# Altium PCB soldering.PcbDoc
Units mm, origin at the board's own origin, x right, y up, seen from the top; angles counter-clockwise.
Board outline 116 x 36 mm, 2 copper layers (Top Layer, Bottom Layer), stack 1.571 mm thick; 53 components, 48 nets, 173 pads, 8 vias.
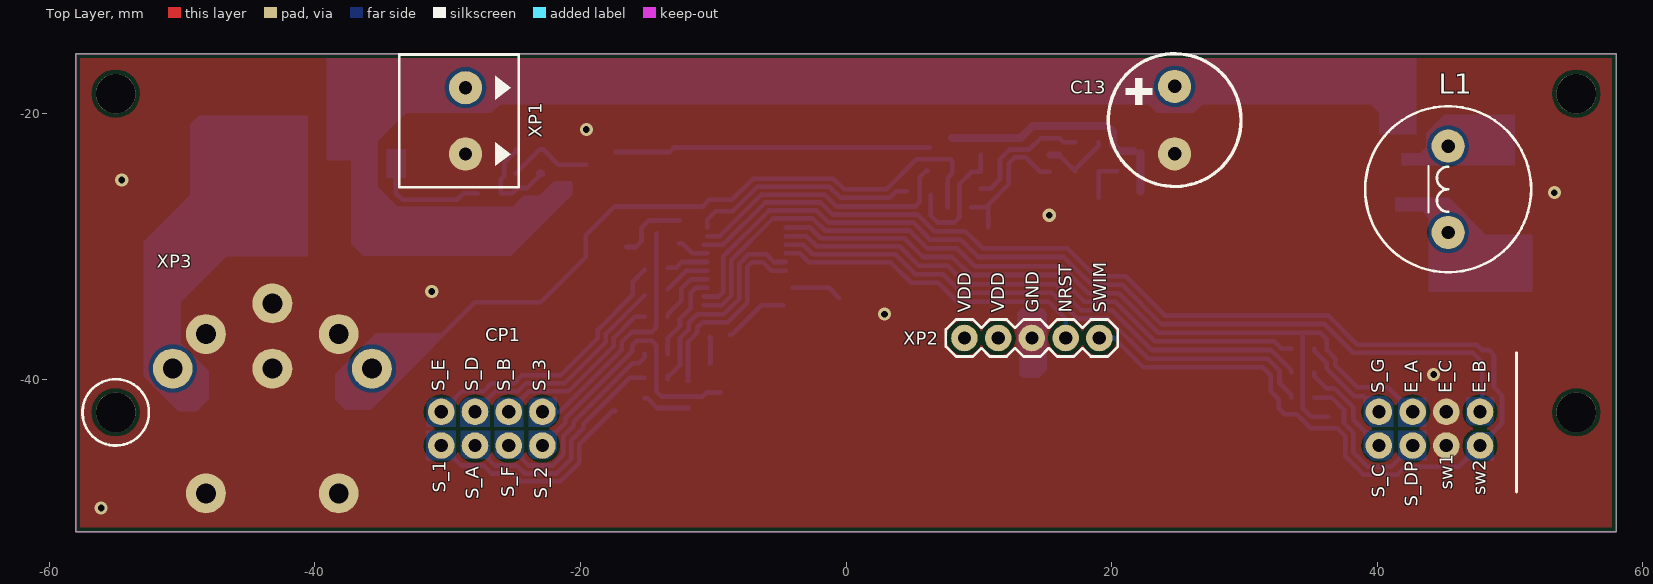
[diagram p0: Top Layer view]
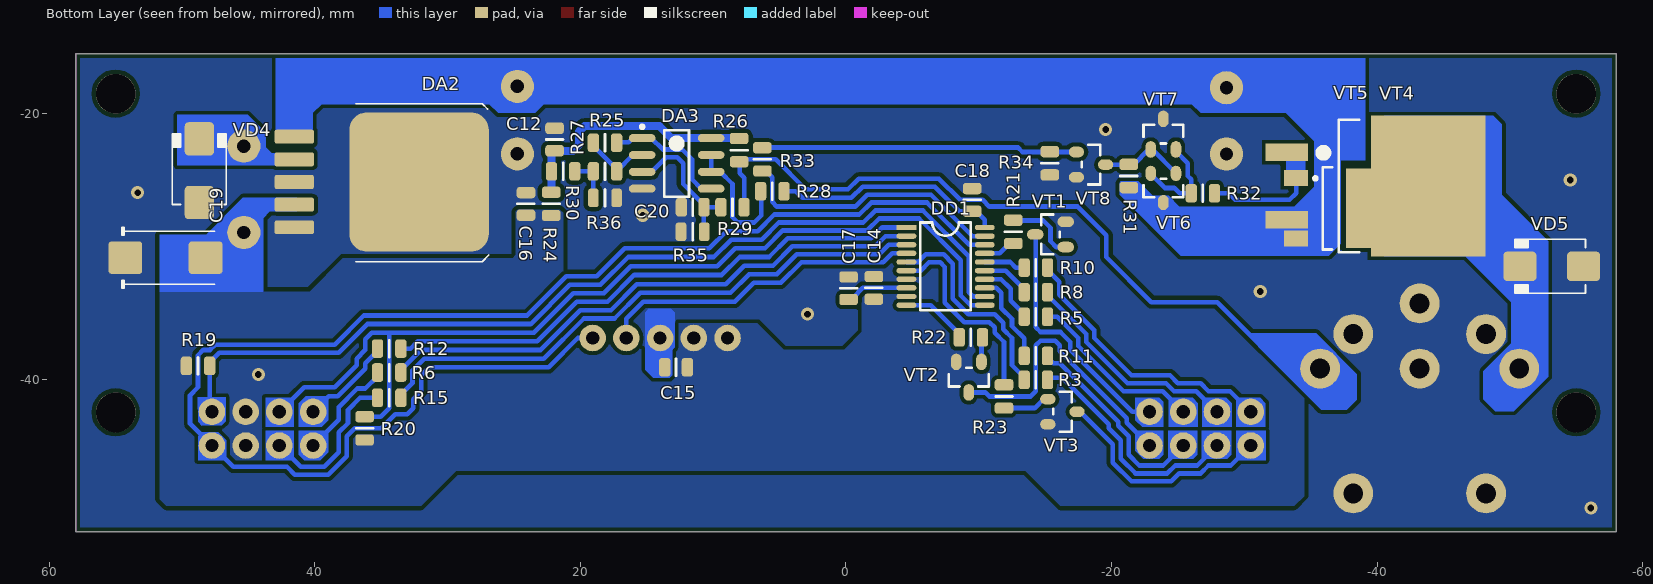
[diagram p1: Bottom Layer view, seen from below]

## Layer stack, top to bottom
Top Solder: solder mask 0.0102, Solder Resist, Dk 3.5
Top Layer: signal copper 0.0356
Dielectric1: core 1.5, FR-4, Dk 4.8
Bottom Layer: signal copper 0.0356
Bottom Solder: solder mask 0.0102, Solder Resist, Dk 3.5

## Board outline
-58,-51.5 -58,-15.5 58,-15.5 58,-51.5

## Design rules (kind name [scope] priority, off if disabled: settings)
Clearance Clearance_3 [IsRegion] p1: gap=0.3 ignorepadtopadclearanceinfootprint=FALSE except(0: Arc-Hole Track-Hole SMDPad-Hole THPad-Hole Via-Hole Fill-Hole Poly-Hole Region-Hole Text-Hole)
Clearance [All] p2: gap=0.25 ignorepadtopadclearanceinfootprint=FALSE
Clearance Clearance_2 [IsPad vs IsPad] p3: gap=0.2 ignorepadtopadclearanceinfootprint=FALSE except(0: Arc-Hole Track-Hole SMDPad-Hole THPad-Hole Via-Hole Fill-Hole Poly-Hole Region-Hole Text-Hole)
Clearance Clearance_1 [IsTrack vs IsTrack] p4: gap=0.2 ignorepadtopadclearanceinfootprint=FALSE except(0: Arc-Hole Track-Hole SMDPad-Hole THPad-Hole Via-Hole Fill-Hole Poly-Hole Region-Hole Text-Hole)
ComponentClearance [All] p1: gap=0.2 collisioncheckmode=3 verticalgap=0.2 showdistances=FALSE
HoleSize [All] p1: absolutevalues=TRUE maxlimit=40 minlimit=0.025 maxpercent=80.000 minpercent=20.000
MinimumSolderMaskSliver [All] p1: minsoldermaskwidth=0.15
PolygonConnect [All] p1: connectstyle=Direct reliefconductorwidth=0.254 reliefentries=4 polygonreliefangle="90 Angle" airgapwidth=0.254
RoutingVias [All] p1: holewidth=0.5 width=1.5 viastyle="Through Hole" minholewidth=0.2 minwidth=1 maxholewidth=2 maxwidth=3
SilkToSilkClearance [All] p1: silktosilkclearance=0.15
SilkToSolderMaskClearance SilkscreenOverComponentPads [IsPad] p1: minsilkscreentomaskgap=0.15 clearancetoexposedcopper=TRUE
SolderMaskExpansion [All] p1: expansion=0.102
Width [All] p1: maxlimit=3 minlimit=0.2 preferedwidth=1
25 further rules are at their usual default settings.

## Components (designator, comment, footprint, x,y, rotation, side; value= is the part's Value field where it differs from the comment)
C12 "10uF" CAP0805R 21.95,-21.95 r90 bottom
C13 "470uF" CAP_EL_10_19_VERT 24.75,-20.49 r90 top
C14 "10uF" CAP0805R -2.1,-33.125 r270 bottom
C15 "10uF" CAP0805R 12.8,-39.1 r180 bottom
C16 "10uF" CAP0805R 24.1,-26.8 r270 bottom
C17 "10uF" CAP0805R -0.2,-33.15 r270 bottom
C18 "100nF" CAP0805R -9.5,-26.5 r270 bottom
C19 "330uF" TAN_D 51.25,-30.85 r180 bottom
C20 "100nF" CAP0805R 11.55,-27.05 r180 bottom
CP1 "CONTROL_PANEL" CONTROL_PANEL -30.48,-45 r0 top
DA2 "LM2575S-5.0" TO-263-5 35.4,-25.15 r180 bottom
DA3 "OP Amp" SOP8 12.75,-23.75 r180 bottom
DD1 "8 Bit MCU" TSSOP20 -7.5,-31.5 r180 bottom
L1 "220 uH" SL1016 45.35,-25.7 r270 top
R3 "22" RES0805R#1 -14.3,-40.05 r180 bottom
R5 "22" RES0805R#1 -14.3,-35.3 r0 bottom
R6 "22" RES0805R#1 34.4,-39.5 r0 bottom
R8 "22" RES0805R#1 -14.3,-33.45 r0 bottom
R10 "22" RES0805R#1 -14.3,-31.6 r0 bottom
R11 "22" RES0805R#1 -14.3,-38.25 r180 bottom
R12 "22" RES0805R#1 34.4,-37.7 r180 bottom
R15 "22" RES0805R#1 34.4,-41.4 r0 bottom
R19 "10k" RES0805R#1 48.8,-39 r0 bottom
R20 "10k" RES0805R#1 36.25,-43.7 r270 bottom
R21 "22" RES0805R#1 -12.6,-28.9 r90 bottom
R22 "22" RES0805R#1 -9.4,-36.85 r180 bottom
R23 "22" RES0805R#1 -11.9,-41.3 r270 bottom
R24 "10" RES0805R#1 22.2,-26.8 r90 bottom
R25 "47k" RES0805R#1 18.15,-22.2 r180 bottom
R26 "1k" RES0805R#1 8.05,-22.75 r90 bottom
R27 "10k" RES0805R#1 18.15,-24.35 r180 bottom
R28 "6k8" RES0805R#1 5.55,-25.85 r180 bottom
R29 "10k" RES0805R#1 8.55,-27.05 r0 bottom
R30 "1k" RES0805R#1 21.3,-24.35 r180 bottom
R31 "10k" RES0805R#1 -21.3,-24.7 r270 bottom
R32 "100" RES0805R#1 -26.875,-26 r180 bottom
R33 "51" RES0805R#1 6.3,-23.45 r270 bottom
R34 "100k" RES0805R#1 -15.352,-23.741 r90 bottom
R35 "100k" RES0805R#2 11.55,-28.9 r180 bottom
R36 "51" RES0805R#2 18.15,-26.35 r0 bottom
VD4 "10BQ100" DO-214AA 48.7,-24.3 r90 bottom
VD5 "10BQ100" DO-214AA -53.15,-31.5 r0 bottom
VT1 "IRLML6402" SOT23#1 -15.4,-29.1 r90 bottom
VT2 "IRLML6402" SOT23#1 -9.25,-39.85 r0 bottom
VT3 "IRLML6402" SOT23#2 -16.3,-42.45 r180 bottom
VT4 "IRF9530NS" D2PAK -39.85,-25.45 r180 bottom
VT5 "STD10PF06T4" DPAK -38.1,-27.13 r180 bottom
VT6 "BC847C" SOT23#2 -23.9,-25.6 r270 bottom
VT7 "BC857B" SOT23#1 -23.9,-21.55 r180 bottom
VT8 "BC847C" SOT23#2 -18.452,-23.841 r180 bottom
XP1 "306-021-12" 306-021-12 -28.65,-20.55 r90 top
XP2 "PLS" PLS-05 14,-36.9 r180 top
XP3 "KDJ01-6" KDJ01-6 -43.2,-51.6 r180 top

## Footprints (in the part's own frame and the unit in brackets; to place one, negate y for a bottom-side part, rotate by r counter-clockwise, add the part's x,y. Pads: shape width x height; smd on the part's side, far side on the other; paste and mask are expansions set on the pad)
306-021-12 [mm]
  round 2.5 hole 1: 1(-2.5,0) 2(2.5,0)
  silkscreen extent -5,-4 5,5, body extent -5,-4 5,5, height 12.62
CAP0805R [mm] "capacitor 0805 reflow soldering"
  rrect50% 0.85x1.4 smd: 1(-0.85,0) 2(0.85,0)
  silkscreen extent 0,-0.64 0,0.64, body extent -1,-0.62 1,0.63, height 0.61
CAP_EL_10_19_VERT [mm]
  round 2.5 hole 1: 1(-2.54,0) 2(2.54,0)
  silkscreen extent -5,-5 5,5, body extent -5.08,-5.07 5.08,5.07, height 20.33
CONTROL_PANEL [mm]
  round 2 hole 1: 1(0,0) 2(0,2.54) 3(2.54,0) 4(2.54,2.54) 5(5.08,0) 6(5.08,2.54) 7(7.62,0) 8(7.62,2.54) 9(70.612,0) 10(70.612,2.54) 11(73.152,0) 12(73.152,2.54) 13(75.692,0) 14(75.692,2.54) 15(78.232,0) 16(78.232,2.54)
  body extent -1.4,-20.7 79.63,7.8, height 19.06
D2PAK [mm] "D2-PAK, 4-Leads, Body 8.8x10.4mm, Pitch 2.54mm, Lead Span 15.1mm, IPC High Density"
  rect 3.2x1.3 smd: 1(-6.65,2.54) 2(-6.65,-2.54)
  rect 8.6x10.6 smd: 3(4,0)
  silkscreen extent -4.2,-5 -1.2,5, body extent -7.69,-5 7.98,5, height 4.81
DO-214AA [mm] "JEDEC DO214 variation AA. SMB"
  round 0.508 on Mech15: 0(0,0)
  rrect25% 2.5x2.2 smd: A(-2.4,0) K(2.4,0)
  silkscreen extent -2.54,-2.03 2.79,2.03, body extent -2.8,-1.97 2.8,1.98, height 2.62
DPAK [mm] "D-PAK, 4-Leads, Body 6.1x6mm, Pitch 2.28mm, Lead Span 9.7mm, IPC High Density"
  rect 1.8x1.2 smd: 1(-4.2,2.28) 2(-4.2,-2.28)
  rect 6x6 smd: 3(2.54,0)
  silkscreen extent -2.88,-3.1 -1.5,3.1, body extent -4.55,-3.28 5.15,3.3, height 2.32
KDJ01-6 [mm]
  round 3 hole 1.5: 1(-7.5,-12.4) 2(-5,-15) 3(0,-17.3) 4(5,-15) 5(7.5,-12.4) 6(0,-12.4) 7(-5,-3) 8(5,-3)
  body extent -10.5,-19.5 10.5,0, height 19.51
PLS-05 [mm]
  round 2 hole 1: 1(-5.08,0) 2(-2.54,0) 3(0,0) 4(2.54,0) 5(5.08,0)
  silkscreen extent -6.48,-1.4 6.48,1.4, body extent -6.35,-1.27 6.35,1.27, height 8.45
RES0805R#1 [mm] "resistor 0805 reflow soldering"
  rrect50% 0.85x1.4 smd: 1(-0.875,0) 2(0.875,0)
  silkscreen extent 0,-0.64 0,0.64, body extent -1,-0.62 1,0.63, height 0.61
RES0805R#2 [mm] "resistor 0805 reflow soldering"
  rrect50% 0.8x1.4 smd: 1(-0.875,0) 2(0.875,0)
  silkscreen extent 0,-0.64 0,0.64, body extent -1,-0.62 1,0.63, height 0.61
SL1016 [mm]
  round 2.5 hole 1: 1(-3.25,0) 2(3.25,0)
  silkscreen extent -6.25,-6.25 6.25,6.25, body extent -6.5,-6.5 6.5,6.5, height 20
SOP8 [mm] "SOP, 8-Leads"
  oval 2x0.6 smd mask+0.1: 1(-2.6,1.905) 2(-2.6,0.635) 3(-2.6,-0.635) 4(-2.6,-1.905) 5(2.6,-1.905) 6(2.6,-0.635) 7(2.6,0.635) 8(2.6,1.905)
  silkscreen extent -2.73,-2.5 0.92,2.88, body extent -2.9,-2.4 2.9,2.4, height 1.77
SOT23#1 [mm]
  oval 0.8x1.25 smd mask+0.1: 1(-0.95,-1.15) 2(0.95,-1.15) 3(0,1.15)
  silkscreen extent -1.5,-0.7 1.5,0.7, body extent -1.46,-1.16 1.46,1.18, height 1
SOT23#2 [mm]
  oval 1.15x0.8 smd mask+0.1: 1(-1.1,0.95) 2(-1.1,-0.95) 3(1.1,0)
  silkscreen extent -0.7,-1.5 0.7,1.5, body extent -1.16,-1.46 1.18,1.46, height 1
TAN_D [mm] "Molded body capacitor, Body 7.3x4.3mm, 2917, IPC Nominal settings"
  round 1 on Mech15: 0(0,0)
  rrect20% 2.55x2.45 smd: 1(-3.025,0) 2(3.025,0)
  silkscreen extent -3.3,-2.3 3.7,2.3, body extent -3.8,-1.97 3.8,1.98, height 3.1
TO-263-5 [mm] "D-PAK/TO-263-5; 5 Leads; Body 14.4 (inc. leads) x 10.4 mm (LxW max)"
  round 0.5 on Mech15: 0(0,0)
  rrect25% 2.95x1.05 smd: 1(-6.15,3.41) 2(-6.15,1.705) 3(-6.15,0) 4(-6.15,-1.705) 5(-6.15,-3.41)
  rrect25% 10.5x10.5 smd: 6(3.25,0)
  silkscreen extent -1.5,-6 8.5,5.9, body extent -6.73,-5.08 7.29,5.08, height 4.56
TSSOP20 [mm] "TSOP, 20-Leads, Body 6,6x4,5mm (max), Pitch 0,65mm, IPC Medium Density"
  rect 1.5x0.4 smd mask+0.05: 1(-2.95,2.925)
  oval 1.5x0.4 smd mask+0.05: 2(-2.95,2.275) 3(-2.95,1.625) 4(-2.95,0.975) 5(-2.95,0.325) 6(-2.95,-0.325) 7(-2.95,-0.975) 8(-2.95,-1.625) 9(-2.95,-2.275) 10(-2.95,-2.925) 11(2.95,-2.925) 12(2.95,-2.275) 13(2.95,-1.625) 14(2.95,-0.975) 15(2.95,-0.325) 16(2.95,0.325) 17(2.95,0.975) 18(2.95,1.625) 19(2.95,2.275) 20(2.95,2.925)
  silkscreen extent -1.9,-3.3 1.9,3.3, body extent -3.27,-3.3 3.28,3.3, height 1.11

## Part data
C12 C14 C15 C16 C17: library part CC0805_10UF_10V_10%_X7R, "SMD 0805 Capacitor", Case=0805, Manufacturer=GENERIC, Manufacturer1 ComponentHeight=1.35mm, Manufacturer1 Example=MURATA, Manufacturer1 Part Number=GRM21BR71A106KE51L, Tolerance=±10%, Voltage=10V, Author="I. Kuznetsov", Component Type=Standard, CreateDate=30.04.2012, HelpURL=\\cern.ch\dfs\Applications\Altium\Datasheets\CC0805_X7R_MURATA.pdf, LatestRevisionDate=30.04.2012, Manufacturer Part Number=CC0805_10UF_10V_10%_X7R, Mounted=Yes, Part Description="SMD Multilayer Chip Ceramic Capacitor", Part Number=CC0805_10UF_10V_10%_X7R, Pin Count=2, SMD=Yes, Socket=No, Status=Preferred, Table="Capacitors SMD", TC=X7R
C13: library part "SH050M0470B5S-1019 (VERT MOUNTED)", Voltage=50V, Part Number="SH050M0470B5S-1019 (VERT MOUNTED)", Table="Electrolytic THD"
C18 C20: library part CC0805_100NF_50V_10%_X7R, "SMD 0805 Capacitor", Case=0805, Manufacturer=GENERIC, Manufacturer1 ComponentHeight=1.35mm, Manufacturer1 Example=EPCOS, Manufacturer1 Part Number=B37941K5104K62, Tolerance=±10%, Voltage=50V, Author="I. Kuznetsov", Component Type=Standard, CreateDate=03.12.2007, HelpURL=\\cern.ch\dfs\Applications\Altium\Datasheets\CC0805_X7R_EPCOS.pdf, LatestRevisionDate=03.12.2007, Manufacturer Part Number=CC0805_100NF_50V_10%_X7R, Mounted=Yes, Part Description="SMD Multilayer Chip Ceramic Capacitor", Part Number=CC0805_100NF_50V_10%_X7R, Pin Count=2, SMD=Yes, Socket=No, Status=Preferred, Table="Capacitors SMD", TC=X7R
C19: library part T495D337M010AHE100, Voltage=10V, Part Number=T495D337M010AHE100, Table=Tantalum
DA2: Case=TO-263-5, Manufacturer=TI, Author="I. Kuznetsov", Component Type=Standard, Device=LM2575S-5.0, Manufacturer Part Number=LM2575S-5.0, Mounted=Yes, Part Number=LM2575S-5.0, Pin Count=6, SMD=Yes, Socket=No, Status=Active, Table=Regulators
DA3: library part LM358AM, PartNumber=LM358AM
DD1: library part STM8S003F3P6, "8 Bit MCU (STmicroelectronics)", PartNumber=STM8S003F3P6
L1: library part SL1016T-4R7K-B-N, Tolerance="± 10%", Part Number=SL1016T-4R7K-B-N, Table="Inductors THD"
R3 R5 R6 R8 R10 R11 R12 R15 R21 R22 R23: library part R0805_22R_1%_0.125W_100PPM, Case=0805, Manufacturer=GENERIC, Manufacturer1 ComponentHeight=0.6mm, Manufacturer1 Example="NIC COMPONENT", Manufacturer1 Part Number=NRC10F22R0TRF, Power=0.125W, Tolerance=±1%, Author="CERN DEM JLC", Component Type=Standard, CreateDate=03.12.2007, HelpURL=\\cern.ch\dfs\Applications\Altium\Datasheets\R0805_NIC_NRC.pdf, LatestRevisionDate=13.03.2008, Manufacturer Part Number=R0805_22R_1%_0.125W_100PPM, Mounted=Yes, Part Description="General Purpose Thick Film Chip Resistor", Part Number=R0805_22R_1%_0.125W_100PPM, Pin Count=2, SMD=Yes, Socket=No, Status=Preferred, Table="Resistors SMD", TC=±100ppm/°C
R19 R20 R27 R29 R31: library part R0805_10K_1%_0.125W_100PPM, Case=0805, Manufacturer=GENERIC, Manufacturer1 ComponentHeight=0.6mm, Manufacturer1 Example="NIC COMPONENT", Manufacturer1 Part Number=NRC10F1002TRF, Power=0.125W, Tolerance=±1%, Author="CERN DEM JLC", Component Type=Standard, HelpURL=\\cern.ch\dfs\Applications\Altium\Datasheets\R0805_NIC_NRC.pdf, Manufacturer Part Number=R0805_10K_1%_0.125W_100PPM, Mounted=Yes, Part Description="General Purpose Thick Film Chip Resistor", Part Number=R0805_10K_1%_0.125W_100PPM, Pin Count=2, SMD=Yes, Socket=No, Status=Preferred, Table="Resistors SMD", TC=±100ppm/°C
  R19 R20 R31: CreateDate=03.12.2007, LatestRevisionDate=13.03.2008
  R27 R29: CreateDate=12/3/2007, LatestRevisionDate=3/13/2008, PackageDescription=Standard
R24: library part R0805_10R_1%_0.125W_200PPM, Case=0805, Manufacturer=GENERIC, Manufacturer1 ComponentHeight=0.6mm, Manufacturer1 Example="NIC COMPONENT", Manufacturer1 Part Number=NRC10F10R0TRF, Power=0.125W, Tolerance=±1%, Author="CERN DEM JLC", Component Type=Standard, CreateDate=03.12.2007, HelpURL=\\cern.ch\dfs\Applications\Altium\Datasheets\R0805_NIC_NRC.pdf, LatestRevisionDate=24.06.2009, Manufacturer Part Number=R0805_10R_1%_0.125W_200PPM, Mounted=Yes, Part Description="General Purpose Thick Film Chip Resistor", Part Number=R0805_10R_1%_0.125W_200PPM, Pin Count=2, SMD=Yes, Socket=No, Status=Preferred, Table="Resistors SMD", TC=±200ppm/°C
R25: library part R0805_47K_1%_0.125W_100PPM, Case=0805, Manufacturer=GENERIC, Manufacturer1 ComponentHeight=0.6mm, Manufacturer1 Example="NIC COMPONENT", Manufacturer1 Part Number=NRC10F4702TRF, Power=0.125W, Tolerance=±1%, Author="CERN DEM JLC", Component Type=Standard, CreateDate=12/3/2007, HelpURL=\\cern.ch\dfs\Applications\Altium\Datasheets\R0805_NIC_NRC.pdf, LatestRevisionDate=3/13/2008, Manufacturer Part Number=R0805_47K_1%_0.125W_100PPM, Mounted=Yes, PackageDescription=Standard, Part Description="General Purpose Thick Film Chip Resistor", Part Number=R0805_47K_1%_0.125W_100PPM, Pin Count=2, SMD=Yes, Socket=No, Status=Preferred, Table="Resistors SMD", TC=±100ppm/°C
R26 R30: library part R0805_1K_1%_0.125W_100PPM, Case=0805, Manufacturer=GENERIC, Manufacturer1 ComponentHeight=0.6mm, Manufacturer1 Example="NIC COMPONENT", Manufacturer1 Part Number=NRC10F1001TRF, Power=0.125W, Tolerance=±1%, Author="CERN DEM JLC", Component Type=Standard, HelpURL=\\cern.ch\dfs\Applications\Altium\Datasheets\R0805_NIC_NRC.pdf, Manufacturer Part Number=R0805_1K_1%_0.125W_100PPM, Mounted=Yes, Part Description="General Purpose Thick Film Chip Resistor", Part Number=R0805_1K_1%_0.125W_100PPM, Pin Count=2, SMD=Yes, Socket=No, Status=Preferred, Table="Resistors SMD", TC=±100ppm/°C
  R26: CreateDate=12/3/2007, LatestRevisionDate=3/13/2008, PackageDescription=Standard
  R30: CreateDate=03.12.2007, LatestRevisionDate=13.03.2008
R28: library part R0805_6K8_1%_0.125W_100PPM, Case=0805, Manufacturer=GENERIC, Manufacturer1 ComponentHeight=0.6mm, Manufacturer1 Example="NIC COMPONENT", Manufacturer1 Part Number=NRC10F6801TRF, Power=0.125W, Tolerance=±1%, Author="CERN DEM JLC", Component Type=Standard, CreateDate=03.12.2007, HelpURL=\\cern.ch\dfs\Applications\Altium\Datasheets\R0805_NIC_NRC.pdf, LatestRevisionDate=13.03.2008, Manufacturer Part Number=R0805_6K8_1%_0.125W_100PPM, Mounted=Yes, Part Description="General Purpose Thick Film Chip Resistor", Part Number=R0805_6K8_1%_0.125W_100PPM, Pin Count=2, SMD=Yes, Socket=No, Status=Preferred, Table="Resistors SMD", TC=±100ppm/°C
R32: library part R0805_100R_1%_0.125W_100PPM, Case=0805, Manufacturer=GENERIC, Manufacturer1 ComponentHeight=0.6mm, Manufacturer1 Example="NIC COMPONENT", Manufacturer1 Part Number=NRC10F4700TRF, Power=0.125W, Tolerance=±1%, Author="CERN DEM JLC", Component Type=Standard, CreateDate=03.12.2007, HelpURL=\\cern.ch\dfs\Applications\Altium\Datasheets\R0805_NIC_NRC.pdf, LatestRevisionDate=13.03.2008, Manufacturer Part Number=R0805_100R_1%_0.125W_100PPM, Mounted=Yes, Part Description="General Purpose Thick Film Chip Resistor", Part Number=R0805_100R_1%_0.125W_100PPM, Pin Count=2, SMD=Yes, Socket=No, Status=Preferred, Table="Resistors SMD", TC=±100ppm/°C
R33 R36: library part R0805_51R_1%_0.125W_100PPM, Case=0805, Manufacturer=GENERIC, Manufacturer1 ComponentHeight=0.6mm, Manufacturer1 Example="NIC COMPONENT", Manufacturer1 Part Number=NRC10F51R0TRF, Power=0.125W, Tolerance=±1%, Author="CERN DEM JLC", Component Type=Standard, HelpURL=\\cern.ch\dfs\Applications\Altium\Datasheets\R0805_NIC_NRC.pdf, Manufacturer Part Number=R0805_51R_1%_0.125W_100PPM, Mounted=Yes, Part Description="General Purpose Thick Film Chip Resistor", Part Number=R0805_51R_1%_0.125W_100PPM, Pin Count=2, SMD=Yes, Socket=No, Status=Preferred, Table="Resistors SMD", TC=±100ppm/°C
  R33: CreateDate=03.12.2007, LatestRevisionDate=13.03.2008
  R36: CreateDate=12/3/2007, LatestRevisionDate=3/13/2008, PackageDescription=Standard
R34 R35: library part R0805_100K_1%_0.125W_100PPM, Case=0805, Manufacturer=GENERIC, Manufacturer1 ComponentHeight=0.6mm, Manufacturer1 Example="NIC COMPONENT", Manufacturer1 Part Number=NRC10F1003TRF, Power=0.125W, Tolerance=±1%, Author="CERN DEM JLC", Component Type=Standard, HelpURL=\\cern.ch\dfs\Applications\Altium\Datasheets\R0805_NIC_NRC.pdf, Manufacturer Part Number=R0805_100K_1%_0.125W_100PPM, Mounted=Yes, Part Description="General Purpose Thick Film Chip Resistor", Part Number=R0805_100K_1%_0.125W_100PPM, Pin Count=2, SMD=Yes, Socket=No, Status=Preferred, Table="Resistors SMD", TC=±100ppm/°C
  R34: CreateDate=03.12.2007, LatestRevisionDate=13.03.2008
  R35: CreateDate=12/3/2007, LatestRevisionDate=3/13/2008, PackageDescription=Standard
VD4 VD5: Case=SMB, Manufacturer=IR, Author="I. Kuznetsov", Component Type=Standard, Device=10BQ100, Manufacturer Part Number=10BQ100, Mounted=Yes, Part Number=10BQ100, Pin Count=2, SMD=Yes, Socket=No, Status=Active, Table=Diode
VT1 VT2 VT3 VT6 VT7 VT8: Case=SOT23, Author="I. Kuznetsov", Component Type=Standard, Mounted=Yes, SMD=Yes, Socket=No, Status=Active, Table=Transistors
  VT1 VT2 VT3: Device=IRLML6402, Part Description="MOSFET P-êàíàë 20Â/3.7À/1.3Âò/0.065 Îì", Part Number=IRLML6402
  VT6 VT8: Device=BC847C, Part Description="NPN 45Â/0.1À Êóñ.=420-800", Part Number=BC847C
  VT7: Device=BC857B, Part Description="PNP 45Â/0.1À Êóñ.=200-450", Part Number=BC857B
VT5: Case=DPAK, Author="I. Kuznetsov", Device=STD10PF06T4, Part Description="MOSFET P-êàíàë 60Â/10À/40Âò/0.032 Îì", Part Number=STD10PF06T4, Table=Transistors
XP2: library part PLS-05, Manufacturer=AUK, Component Type=Standard, Family=PLS, Manufacturer Part Number=PLS-05, PackageDescription=PLS-05, Part Number=PLS-05, Pin Count=5, SMD=Yes, Table=AUK
VT4: Device=IRF9530NS, Part Description="MOSFET P-êàíàë 100Â/14À/79Âò/0.2 Îì", Part Number=IRF9530NS, Table=Transistors
XP1: ComponentLink1URL=http://www.promelec.ru/pdf/305,306.pdf, Device=306-021-12, Family=DG306, Part Number=306-021-12, Table=DEGSON
XP3: Device=KDJ01-6, Family=KDJ01-6, Part Number=KDJ01-6, Table=OTHER

## Free pads (board coordinates)
  round 3 hole 3 unplated: 1(-55,-42.5) 1(-55,-18.5) 1(55,-42.5) 1(55,-18.5)

## Via types
v1: diameter 1, hole 0.5, Top Layer to Bottom Layer, tented both sides, 8 vias

## Nets (pads, with @x,y where several pads share a name; then routed paths per layer and width w, separated by ;. In a path a pad name is that pad's centre, name@x,y a point inside that pad or via, vN(x,y) a via of type N, cw(c..) or ccw(c..) an arc to the next point about the centre after c; other vN are vias at no path point)
+24V: C13.2 DA2.1 R31.2 VT4.2 VT5.2 VT6.3 XP1.2
ENC_A: CP1.12 DD1.11 R20.1 | length 72.2
  Bottom Layer w0.35: DD1.11@-10.7,-34.425 DD1.11 -9.375,-34.425 -8.65,-33.7 -8.65,-31.05 -5.5,-27.9 -2.5,-27.9 -1.6,-28.8 4.75,-28.8 6.1,-30.15 8.35,-30.15 9.7,-31.5 16.2,-31.5 18.228,-33.528 20.528,-33.528 23.5,-36.5 35.7,-36.5 36.2,-37 36.2,-37.8 36.85,-38.45 36.85,-38.95 38.5,-40.6 40.812,-40.6 CP1.12 ; 34.4,-36.6 34.4,-42.2 35.025,-42.825 R20.1 R20.1@36.3,-42.825
ENC_B: CP1.16 DD1.12 R19.1 | length 71.2
  Bottom Layer w0.35: DD1.12@-10.7,-33.775 DD1.12 -9.575,-33.775 -9.25,-33.45 -9.25,-30.75 -5.8,-27.3 -2.2,-27.3 -1.3,-28.2 5.05,-28.2 6.35,-29.5 8.65,-29.5 9.95,-30.8 16.4,-30.8 18.493,-32.893 20.793,-32.893 23.75,-35.85 36.05,-35.85 38.2,-38 47.2,-38 47.925,-38.725 R19.1 CP1.16@47.925,-42.287
F_CTL: R32.2 VT4.1 VT5.1 | length 9.4
  Bottom Layer w0.35: VT4.1@-33.9,-23.15 VT5.1 -33.9,-26 -33.4,-26.5 -29.3,-26.5 -28.8,-26 R32.2
GND: C12.2 C13.1 C14.1 C15.1 C16.1 C17.1 C18.1 C19.1 C20.1 CP1.13 CP1.14 DA2.3 DA2.5 DA2.6 DA3.4 DD1.7 R34.1 R35.1 R36.1 VD4.A VD5.A VT7.3 VT8.2 XP1.1 XP2.3 XP3.2 XP3.3 XP3.4 XP3.6 XP3.7 XP3.8
  other v1: -56.1,-49.7 44.25,-39.65 2.9,-35.1 -31.2,-33.4 15.3,-27.65 53.35,-25.95 -54.55,-25 -19.55,-21.2
IRON_PTC: R26.1 R29.1 XP3.1 | length 55.5
  Bottom Layer w0.35: XP3.1 -32.95,-39.2 -27.95,-34.2 -23,-34.2 -19.6,-30.8 -19.6,-29.15 -17.45,-27 -10.8,-27 -10.3,-26.5 -8.6,-26.5 -7,-24.9 -0.95,-24.9 -0.15,-25.7 3.05,-25.7 5.3,-23.45 7.875,-23.45 8,-23.575 8,-24.5 7.675,-24.825 R29.1
IRON_PWM: DD1.19 R33.2 | length 20.5
  Bottom Layer w0.35: DD1.19 -9.525,-29.225 -6.4,-26.1 -1.6,-26.1 -0.7,-27 5.2,-27 5.55,-26.65 5.55,-24.8 6.025,-24.325 R33.2@6.15,-24.325
IRON_PWR: VD5.K VT4.3 VT5.3 XP3.5
NetC12_1: C12.1 DA3.8 R24.2 R26.2 R30.1 | length 18.3
  Bottom Layer w0.6: R26.2@8,-21.825 8.025,-21.85 13.15,-21.85 14.05,-20.95 19.7,-20.95 20.1,-21.35 20.1,-22.35 20.55,-22.8 C12.1@21.65,-22.8 ; R24.2@22.175,-25.875 R30.1 C12.1@22.175,-22.95
NetC20_2: C20.2 DA3.3 R29.2 R35.2 | length 10.5
  Bottom Layer w0.35: R29.2 C20.2 ; R35.2@10.7,-28.55 C20.2 ; DA3.3 14.635,-24.385 13.55,-23.3 12.7,-23.3 12.25,-23.75 12.25,-25.3 10.7,-26.85 C20.2
NetCP1_2: CP1.2 R10.1 | length 20.7
  Bottom Layer w0.35: CP1.2 -28.92,-40.9 -27.3,-40.9 -26.7,-40.3 -25,-40.3 -24.4,-39.7 -21.5,-39.7 -18.7,-36.9 -18.7,-36.3 -16.05,-33.65 -16.05,-32.65 R10.1@-15.175,-31.775
NetCP1_3: CP1.3 R3.2 | length 17.6
  Bottom Layer w0.35: CP1.3 -26.44,-46.5 -24.8,-46.5 -24.2,-47.1 -21.8,-47.1 -20.7,-46 -20.7,-44.6 -19.8,-43.7 -19.8,-43.4 -16.3,-39.9 R3.2@-15.175,-39.9
NetCP1_4: CP1.4 R8.1 | length 16.8
  Bottom Layer w0.35: CP1.4 -26.38,-40.9 -24.7,-40.9 -24.1,-40.3 -21.2,-40.3 -18.1,-37.2 -18.1,-36.6 R8.1@-15.175,-33.675
NetCP1_5: CP1.5 R11.2 | length 15.5
  Bottom Layer w0.35: CP1.5 -23.9,-46.5 -22.1,-46.5 -21.3,-45.7 -21.3,-44.3 -20.5,-43.5 -20.5,-43.2 -16.1,-38.8 -15.6,-38.8 -15.175,-38.375 R11.2 R11.2@-15.175,-38.1
NetCP1_6: CP1.6 R5.1 | length 13.5
  Bottom Layer w0.35: CP1.6 -23.84,-40.9 -20.9,-40.9 -17.5,-37.5 -17.5,-36.9 -15.9,-35.3 R5.1
NetCP1_9: CP1.9 R6.2 | length 7.9
  Bottom Layer w0.35: R6.2 35.275,-39.775 36.2,-40.7 36.8,-40.7 38.2,-42.1 38.2,-43.068 CP1.9
NetCP1_10: CP1.10 R12.1 | length 7.2
  Bottom Layer w0.35: R12.1 35.275,-37.875 36.2,-38.8 36.2,-39.2 38.275,-41.275 38.947,-41.275 CP1.10
NetCP1_11: CP1.11 R15.2 | length 11.7
  Bottom Layer w0.35: R15.2 36.6,-41.4 37.5,-42.3 37.5,-43.3 38.2,-44 38.2,-45.5 39.3,-46.6 41.072,-46.6 CP1.11
NetDA2_2: DA2.2 L1.1 VD4.K
NetDA3_1: DA3.1 DA3.5 R25.2 | length 9.7
  Bottom Layer w0.35: DA3.5 10.895,-25.655 11.6,-24.95 11.6,-23.45 12.35,-22.7 13.8,-22.7 14.655,-21.845 DA3.1 16.045,-21.845 16.35,-22.15 R25.2@17.275,-22.15
NetDA3_2: DA3.2 R25.1 R27.2 | length 5.3
  Bottom Layer w0.35: DA3.2@16.04,-23.115 R27.2 17.275,-24.175 19.025,-22.425 R25.1 ; R25.1@19,-22.175 R25.1@19.025,-22.15
  Bottom Layer w0.5: DA3.2 DA3.2@16.04,-23.115
NetDA3_6: DA3.6 DA3.7 R28.1 | length 9.9
  Bottom Layer w0.35: R28.1@6.375,-26.1 6.375,-27.675 6.9,-28.2 8.15,-28.2 8.55,-27.8 8.55,-25.3 9.465,-24.385 DA3.6 DA3.7
NetR21_2: R21.2 VT1.1 | length 5.4
  Bottom Layer w0.35: VT1.1 -15.85,-30.05 -15.4,-29.6 -15.4,-28.6 -14.85,-28.05 R21.2@-12.525,-28.05
NetR22_2: R22.2 VT2.1 | length 2.1
  Bottom Layer w0.35: R22.2@-10.275,-36.8 -10.2,-36.875 -10.2,-38.8 VT2.1@-10.25,-38.85
NetR23_2: R23.2 VT3.1 | length 3.6
  Bottom Layer w0.35: VT3.1@-15.2,-41.45 -14.95,-41.45 -14.225,-42.175 R23.2
NetR27_1: R27.1 R30.2 R36.2 | length 3.4
  Bottom Layer w0.35: R36.2 R27.1 R30.2
NetR31_1: R31.1 VT6.1 VT7.1 VT8.3 | length 6.5
  Bottom Layer w0.35: VT6.1 -23.05,-22.7 VT7.1 -22.8,-22.7 -21.659,-23.841 VT8.3
NetR32_1: R32.1 VT6.2 VT7.2 | length 7.5
  Bottom Layer w0.35: VT7.2 -24.85,-22.85 -25.75,-23.75 -25.75,-24.7 -26,-24.95 R32.1 -25.125,-26 -24.725,-25.6 -24,-25.6 VT6.2@-22.95,-24.55
  Bottom Layer w0.6: VT6.2@-23.05,-24.5 VT6.2
NetR33_1: R33.1 R34.2 VT8.1 | length 23.8
  Bottom Layer w0.35: VT8.1 -13.291,-22.891 -12.95,-22.55 R33.1@6.3,-22.55
NRST: DD1.4 XP2.2 | length 24.6
  Bottom Layer w0.35: DD1.4 -3.475,-30.525 -2.8,-31.2 3.35,-31.2 4.9,-32.75 6.95,-32.75 8.363,-34.163 15.263,-34.163 16.54,-35.44 XP2.2
PWR_SEG1: CP1.1 VT3.3 | length 17.2
  Bottom Layer w0.35: CP1.1 -28.98,-46.5 -27.3,-46.5 -26.7,-47.1 -25.1,-47.1 -24.5,-47.7 -21.5,-47.7 -20.1,-46.3 -20.1,-44.9 -17.6,-42.4 VT3.3@-17.4,-42.4
PWR_SEG2: CP1.7 VT2.3 | length 21
  Bottom Layer w0.35: CP1.7 -21.15,-43.29 -21.15,-42.95 -16.1,-37.9 -16.1,-37.45 -15.75,-37.1 -14.65,-37.1 -14.3,-37.45 -14.3,-40.9 -13.9,-41.3 -10.8,-41.3 -10.5,-41 VT2.3@-9.45,-41
PWR_SEG3: CP1.8 VT1.3 | length 18.7
  Bottom Layer w0.35: CP1.8 -21.56,-42.46 -16.9,-37.8 -16.9,-37.2 -16.15,-36.45 -14.65,-36.45 -14.3,-36.1 -14.3,-29.05 VT1.3@-14.25,-29
SEG1: DD1.6 R23.1 | length 14.8
  Bottom Layer w0.35: R23.1@-11.9,-40.125 -11.9,-37.2 -11.2,-36.5 -11.2,-36.1 -10.8,-35.7 -8.9,-35.7 -7.45,-34.25 -7.45,-31.55 -7.1,-31.2 -6.25,-31.2 -5.625,-31.825 DD1.6
SEG2: DD1.10 R22.1 | length 5
  Bottom Layer w0.35: R22.1@-8.75,-36.65 -8.6,-36.65 -6.375,-34.425 DD1.10@-4.7,-34.425
SEG3: DD1.17 R21.1 | length 2.5
  Bottom Layer w0.35: R21.1 -12.325,-29.775 -11.575,-30.525 DD1.17
SEG_A: DD1.5 R3.1 | length 16.3
  Bottom Layer w0.35: R3.1@-13.425,-40 R3.1@-13.425,-39.875 ; R3.1@-13.425,-39.725 R3.1@-13.425,-39.875 ; DD1.5 -5.425,-31.175 -6,-30.6 -7.35,-30.6 -8.05,-31.3 -8.05,-33.95 -9.2,-35.1 -11.2,-35.1 -11.85,-35.75 -11.85,-36.25 -12.5,-36.9 -12.5,-38.95 R3.1@-13.425,-39.875
SEG_B: DD1.14 R5.2 | length 4.8
  Bottom Layer w0.35: R5.2 -13.425,-35.125 -12.4,-34.1 -12.4,-33.2 -11.675,-32.475 DD1.14
SEG_C: DD1.2 R6.1 | length 42.4
  Bottom Layer w0.35: DD1.2 -2.975,-29.225 -2.2,-30 4.05,-30 5.5,-31.45 7.65,-31.45 9.05,-32.85 15.75,-32.85 17.698,-34.798 19.998,-34.798 23,-37.8 32,-37.8 33.525,-39.325 R6.1
SEG_D: DD1.15 R8.2 | length 3.6
  Bottom Layer w0.35: R8.2@-13.425,-33.225 -12.025,-31.825 DD1.15
SEG_DP: DD1.3 R15.1 | length 43.5
  Bottom Layer w0.35: DD1.3 -3.225,-29.875 -2.5,-30.6 3.7,-30.6 5.2,-32.1 7.3,-32.1 8.7,-33.5 15.5,-33.5 17.433,-35.433 19.733,-35.433 22.75,-38.45 31.75,-38.45 32.65,-39.35 32.65,-40.3 33.525,-41.175 R15.1
SEG_E: DD1.16 R10.2 | length 3.2
  Bottom Layer w0.35: R10.2 -12.8,-31.6 -12.375,-31.175 DD1.16
SEG_F: DD1.13 R11.1 | length 6.7
  Bottom Layer w0.35: R11.1@-13.425,-38.1 -13.425,-36.925 -12.5,-36 -12.5,-35.45 -11.7,-34.65 -11.7,-33.5 -11.325,-33.125 DD1.13
SEG_G: DD1.1 R12.2 | length 41.9
  Bottom Layer w0.35: DD1.1 -2.725,-28.575 -1.9,-29.4 4.4,-29.4 5.8,-30.8 8,-30.8 9.35,-32.15 15.95,-32.15 17.963,-34.163 20.263,-34.163 23.25,-37.15 32.25,-37.15 32.8,-37.7 R12.2
SWIM: CP1.15 DD1.18 XP2.1 | length 109.2
  Bottom Layer w0.35: DD1.18@-10.7,-29.875 DD1.18 -9.275,-29.875 -6.1,-26.7 -1.9,-26.7 -1,-27.6 5.4,-27.6 6.65,-28.85 9,-28.85 10.3,-30.15 16.65,-30.15 18.758,-32.258 21.058,-32.258 24,-35.2 36.3,-35.2 38.5,-37.4 47.5,-37.4 47.9,-37.8 48.4,-37.8 48.8,-38.2 48.8,-40.6 49.4,-41.2 49.4,-43.352 CP1.15 46.152,-46.6 42.1,-46.6 41.5,-47.2 39,-47.2 37.6,-45.8 37.6,-44.3 37,-43.7 35,-43.7 33.95,-42.65 33.05,-42.65 32.6,-42.2 32.6,-41.5 32,-40.9 32,-39.7 31.4,-39.1 22.4,-39.1 20.2,-36.9 XP2.1
TEMP_IN: C18.2 DD1.20 R28.2 | length 17.2
  Bottom Layer w0.35: DD1.20 -10.45,-28 -9.8,-27.35 C18.2 -8.55,-27.35 -6.7,-25.5 -1.25,-25.5 -0.4,-26.35 3.3,-26.35 3.8,-25.85 R28.2@4.625,-25.85
VCAP: C17.2 DD1.8 | length 3.8
  Bottom Layer w0.35: DD1.8@-4,-33.125 -1.275,-33.125 C17.2@-0.5,-33.9
VDD: C14.2 C15.2 C16.2 C19.2 DA2.4 DD1.9 L1.2 R19.2 R20.2 R24.1 VT1.2 VT2.2 VT3.2 XP2.4 XP2.5
pads on no net: C19.0 DA2.0 VD4.0 VD5.0

## Polygon pours and split planes (outlines as drawn)
GND on Bottom Layer "GND" (solid, remove dead copper, pour order 21): -58,-15.5 -58,-51.5 58,-51.5 58,-15.5
VDD on Bottom Layer "Top Layer-No Net" (solid, remove dead copper, pour order 16): 21.311,-27.461 21.311,-32.05 21.311,-35.775 15.35,-35.775 6.675,-35.775 4.675,-37.775 0.15,-37.775 -1.2,-36.425 -1.2,-33.6 -1.4,-33.4 -5.3,-33.4 -5.3,-34.1 -7.3,-34.1 -7.3,-27.5 -20,-27.5 -20.55,-27.5 -34.5,-41.45 -34.5,-42.95 -34.5,-48.8 -33.75,-49.55 -16.15,-49.55 -13.5,-46.9 29.35,-46.9 32,-49.55 51.2,-49.55 51.7,-49.05 51.7,-34.3 51.7,-33.4 40.4,-33.4 37.89,-30.89 25.1,-30.89 24.855,-30.645 24.855,-27.35 24.727,-27.223 21.55,-27.223
GND on Top Layer "Top Layer-No Net" (solid, remove dead copper, pour order 17): -58,-51.5 -58,-17.907 -58,-14.5 -33.95,-14.5 9.7,-14.5 21,-14.5 38,-14.5 58,-14.5 58,-51.5

## Keep-outs
Keep-Out Layer:
  the board outline again, w0.05

## Other copper
Bottom Layer:
  region net F_CTL: -34.6,-22.675 -34.6,-24.825 -33.15,-24.825 -33.15,-22.675
  region net IRON_PTC: -30.55,-36.55 -35.4,-36.55 -38.475,-39.625 -38.475,-41.55 -37.725,-42.3 -35.8,-42.3 -31.05,-37.55
  region net NetDA2_2: 41.85,-23 43.25,-23 43.7,-22.55 43.7,-21.45 45.05,-20.1 50.35,-20.1 50.35,-23.9 41.85,-23.9
  region net VDD: 41.35,-26.35 45.417,-26.35 48.183,-29.117 51.7,-29.117 51.7,-33.4 43.9,-33.4 43.9,-27.867 43.383,-27.35 41.35,-27.35
  region net IRON_PWR: -40.55,-20.15 -48.75,-20.15 -49.4,-20.8 -49.4,-26.1 -52.9,-29.6 -52.9,-39.8 -50.3,-42.4 -48.9,-42.4 -48,-41.5 -48,-39.4 -50.1,-37.3 -50.1,-34.2 -46.65,-30.75 -40.55,-30.75
  region net +24V: 42.95,-15.85 42.95,-21.55 40.15,-21.55 40.15,-19.95 39.5,-19.3 26.85,-19.3 26.2,-19.95 23.4,-19.95 22.75,-19.3 -26.05,-19.3 -26.7,-19.95 -33.1,-19.95 -35.25,-22.1 -35.25,-25.5 -33.75,-27 -25.1,-27 -24.3,-26.2 -23.1,-26.2 -22,-25.1 -20.7,-25.1 -20.6,-25.2 -20.6,-26.1 -25.2,-30.7 -36.35,-30.7 -37.25,-29.8 -37.25,-23.5 -39.1,-23.5 -39.1,-15.85
  region net GND: 14.9,-34.7 15.1,-35 15.1,-39.3 14.5,-39.9 13.3,-39.9 13.1,-39.7 13.1,-37.8 12.9,-37.6 12.9,-35 13.2,-34.7
  region net NetCP1_6: -24.3,-43.6 -26.5,-43.6 -26.5,-41.8 -26.1,-41.4 -24.3,-41.4
  region net NetCP1_4: -26.84,-43.6 -29.04,-43.6 -29.04,-41.8 -28.64,-41.4 -26.84,-41.4
  region net NetCP1_2: -29.38,-43.6 -31.58,-43.6 -31.58,-41.8 -31.18,-41.4 -29.38,-41.4
  region net PWR_SEG1: -29.4,-46.1 -31.6,-46.1 -31.6,-43.9 -29.4,-43.9
  region net NetCP1_3: -26.8,-46 -28.7,-46 -29,-45.7 -29,-43.9 -26.8,-43.9
  region net NetCP1_5: -24.26,-46 -26.16,-46 -26.46,-45.7 -26.46,-43.9 -24.26,-43.9
  region net PWR_SEG2: -21.8,-43.9 -23.9,-43.9 -23.9,-45.7 -23.6,-46 -22.4,-46 -21.8,-45.4
  region net PWR_SEG3: -21.8,-41.4 -23.6,-41.4 -23.9,-41.7 -23.9,-43.6 -22.3,-43.6 -21.8,-43.1
  region net ENC_A: 41.6,-43.6 43.7,-43.6 43.7,-41.4 41.6,-41.4
  region net NetCP1_10: 39.5,-43.6 41.2,-43.6 41.2,-41.8 40.7,-41.3 39,-41.3 39,-43.1
  region net NetCP1_9: 39,-45.5 39.6,-46.1 40.8,-46.1 41.2,-45.7 41.2,-43.9 39,-43.9
  region net NetCP1_11: 41.6,-46.1 43.712,-46.1 43.7,-44.3 43.7,-43.9 41.6,-43.9
  region net SWIM: 46.692,-46.1 48.792,-46.1 48.792,-44.3 48.492,-44 47.292,-44 46.692,-44.6
  region net ENC_B: 48.812,-41.36 46.712,-41.36 46.712,-43.16 47.012,-43.46 48.5,-43.5 48.8,-43.2

## Silkscreen, mask and mechanical layers (free items; w line width, h text height)
Top Overlay:
  circle w0.2: c-55,-42.5 r2.5
  lines w0.2: 50.5,-48.5 50.5,-38
  text "VDD" at 9.4,-35 h1 r90
  text "VDD" at 11.9,-35 h1 r90
  text "GND" at 14.5,-35 h1 r90
  text "NRST" at 17,-35 h1 r90
  text "SWIM" at 19.6,-35 h1 r90

## Text inside footprints (layer, text, board x,y; h text height)
CP1: Top Overlay "S_DP" at 43.075,-49.626 h1 r90; Top Overlay "sw1" at 45.697,-48.345 h1 r90; Top Overlay "sw2" at 48.191,-48.745 h1 r90; Top Overlay "E_B" at 48.184,-41.052 h1 r90; Top Overlay "E_C" at 45.604,-41.068 h1 r90; Top Overlay "E_A" at 43.075,-41.052 h1 r90; Top Overlay "S_G" at 40.542,-41.052 h1 r90; Top Overlay "S_C" at 40.578,-48.913 h1 r90; Top Overlay "S_E" at -30.228,-40.896 h1 r90; Top Overlay "S_D" at -27.688,-40.896 h1 r90; Top Overlay "S_B" at -25.275,-40.896 h1 r90; Top Overlay "S_3" at -22.608,-40.896 h1 r90; Top Overlay "S_1" at -30.128,-48.555 h1 r90; Top Overlay "S_A" at -27.645,-49.039 h1 r90; Top Overlay "S_F" at -24.999,-48.9 h1 r90; Top Overlay "S_2" at -22.503,-48.994 h1 r90